# Altium PCB PCB MotherBoard.PcbDoc
Units mm, origin at the board's own origin, x right, y up, seen from the top; angles counter-clockwise.
Board outline 130.1 x 83 mm, 2 copper layers (Top Layer, Bottom Layer); 61 components, 59 nets, 301 pads, 0 vias.
Unrouted connection lines stored in the file: 177.
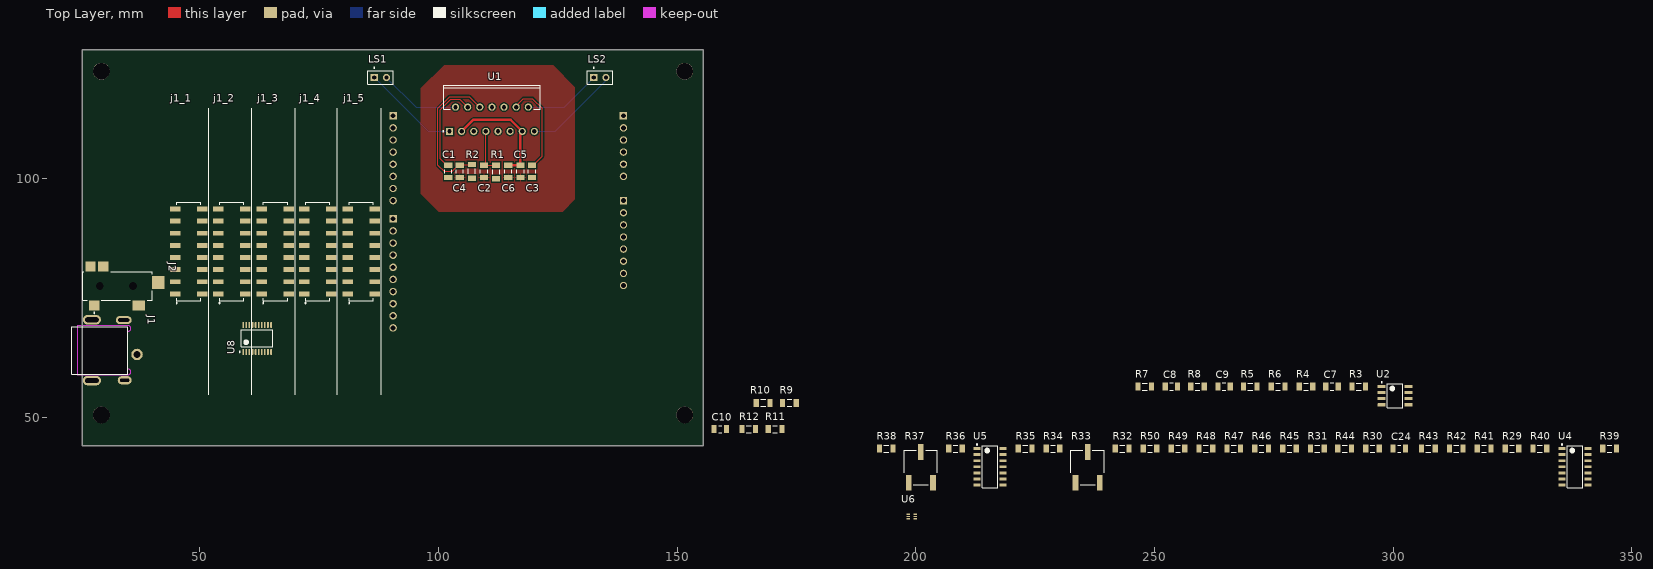
[diagram p0: Top Layer view]
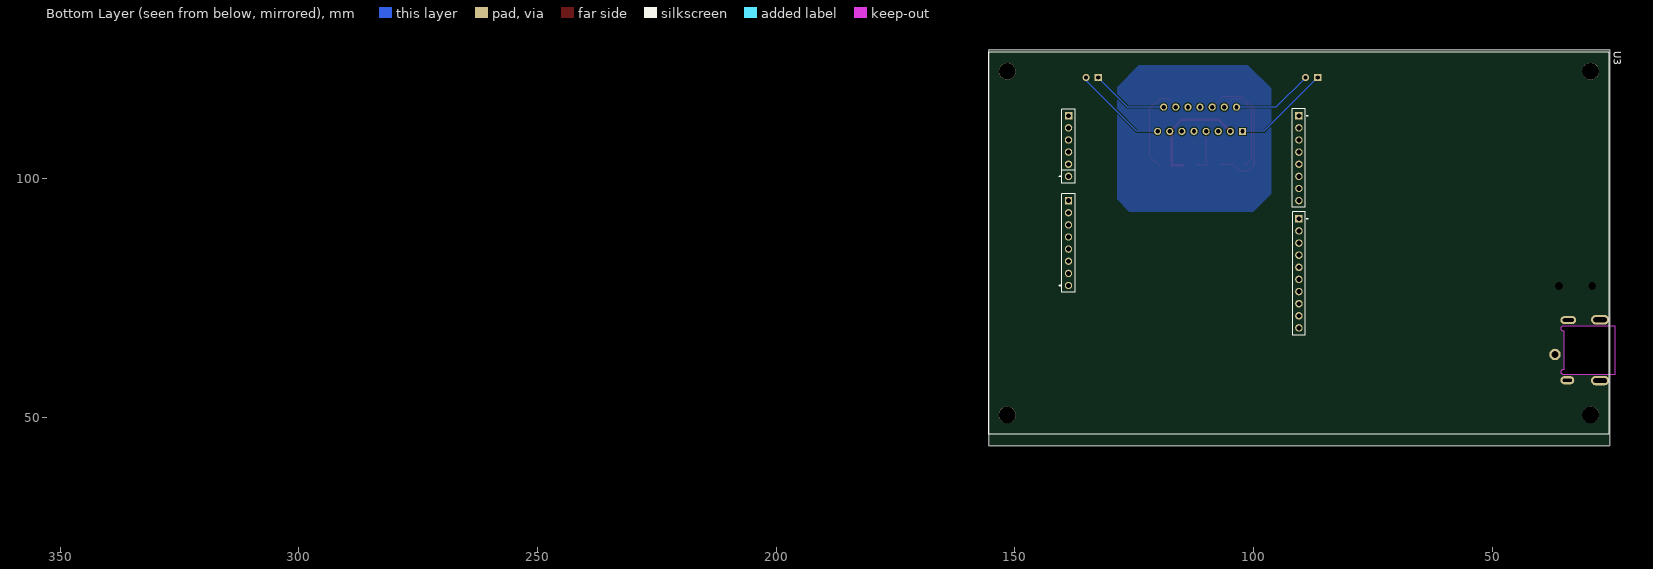
[diagram p1: Bottom Layer view, seen from below]

## Layer stack, top to bottom
Top Solder: solder mask 0.0102, Solder Resist, Dk 3.5
Top Layer: signal copper 0.0356
Dielectric 1: dielectric 0.32, FR-4, Dk 4.8
Bottom Layer: signal copper 0.0356
Bottom Solder: solder mask 0.0102, Solder Resist, Dk 3.5

## Board outline
25.4,44 155.5,44 155.5,127 25.4,127

## Design rules (kind name [scope] priority, off if disabled: settings)
Clearance [All] p1: gap=0.254 ignorepadtopadclearanceinfootprint=FALSE except(0: Arc-Hole Track-Hole SMDPad-Hole THPad-Hole Via-Hole Fill-Hole Poly-Hole Region-Hole Text-Hole)
Height [All] p1: minheight=0 maxheight=2539.975 prefheight=12.7
PolygonConnect [All] p1: connectstyle=Relief reliefconductorwidth=0.254 reliefentries=4 polygonreliefangle="90 Angle" airgapwidth=0.254
RoomDefinition SS6 [InComponentClass('SS6')] p1: confinementstyle=ConfineIn formatcopy=TRUE lockcomponents=FALSE outline 95.947,89.817 128.586,89.817 128.586,125.504 95.947,125.504
RoutingVias [All] p1: holewidth=0.711 width=1.27 viastyle="Through Hole" minholewidth=0.711 minwidth=1.27 maxholewidth=0.711 maxwidth=1.27
SolderMaskExpansion [All] p1: expansion=0.102 istentingtop=FALSE
Width [All] p1: maxlimit=10 minlimit=0.254 preferedwidth=0.254 minimp=50.000000 maximp=50.000000 favimp=50.000000
29 further rules are at their usual default settings.

## Classes and differential pairs
net class "Output R BP[5..1]": "Output R BP1" "Output R BP2" "Output R BP3" "Output R BP4" "Output R BP5"
net class "Output L BP[5..1]": "Output L BP1" "Output L BP2" "Output L BP3" "Output L BP4" "Output L BP5"
net class "AGC Data BP[5..1]": "AGC Data BP1" "AGC Data BP2" "AGC Data BP3" "AGC Data BP4" "AGC Data BP5"
component class SS6: C1 C2 C3 C4 C5 C6 R1 R2 U1
channel class "BP Header": SS1 SS2 SS3 SS4 SS5
component class SS5: j1_5
component class SS4: j1_4
component class SS3: j1_3
component class SS2: j1_2
component class SS1: j1_1
component class "Schematic MotherBoard": C7 C8 C9 C10 C24 J1 J2 LS1 LS2 R3 R4 R5 R6 R7 R8 R9 R10 R11 R12 R29 R30 R31 R32 R33 R34 R35 R36 R37 R38 R39 R40 R41 R42 R43 R44 R45 R46 R47 R48 R49 R50 U2 U3 U4 U5 U6 U8

## Components (designator, comment, footprint, x,y, rotation, side; value= is the part's Value field where it differs from the comment)
C1 "1206GC102KAT1A" AVX-1206-2_L 102.043,101.501 r270 top
C2 "1206GC102KAT1A" AVX-1206-2_L 109.536,101.501 r270 top
C3 "1206GC102KAT1A" AVX-1206-2_L 119.569,101.501 r270 top
C4 "1206GC102KAT1A" AVX-1206-2_L 104.456,101.501 r270 top
C5 "1206GC102KAT1A" AVX-1206-2_L 117.156,101.501 r270 top
C6 "1206GC102KAT1A" AVX-1206-2_L 114.616,101.501 r270 top
C7 "1206GC102KAT1A" AVX-1206-2_L 287.173,56.424 r0 top
C8 "1206GC102KAT1A" AVX-1206-2_L 253.518,56.424 r0 top
C9 "1206GC102KAT1A" AVX-1206-2_L 264.567,56.424 r0 top
C10 "1206GC102KAT1A" AVX-1206-2_L 159,47.5 r0 top
C24 "1206GC102KAT1A" AVX-1206-2_L 301.244,43.434 r0 top
J1 "694105309102" 694105309102 29,64 r270 top
j1_1 "SSM-108-S-DV" "Band Pass Board" 44.85,75.84 r90 top (schematic designator j1)
j1_2 "SSM-108-S-DV" "Band Pass Board" 53.85,75.84 r90 top (schematic designator j1)
j1_3 "SSM-108-S-DV" "Band Pass Board" 63,75.84 r90 top (schematic designator j1)
j1_4 "SSM-108-S-DV" "Band Pass Board" 71.85,75.84 r90 top (schematic designator j1)
j1_5 "SSM-108-S-DV" "Band Pass Board" 81,75.84 r90 top (schematic designator j1)
J2 "35RASMT4BHNTRX" SWIT-35RASMT4BHNTRX_V 34.2,77.5 r0 top
LS1 "Speaker" PIN2 86.549,121.158 r0 top
LS2 "Speaker" PIN2 132.523,121.158 r0 top
R1 "ERJ-8GEY0R00V" RESC3216X70X50NL05T20 112.076,101.374 r90 top
R2 "ERJ-8GEY0R00V" RESC3216X70X50NL05T20 106.996,101.501 r90 top
R3 "ERJ-8GEY0R00V" RESC3216X70X50NL05T20 292.761,56.424 r0 top
R4 "ERJ-8GEY0R00V" RESC3216X70X50NL05T20 281.712,56.424 r0 top
R5 "ERJ-8GEY0R00V" RESC3216X70X50NL05T20 270.028,56.424 r0 top
R6 "ERJ-8GEY0R00V" RESC3216X70X50NL05T20 275.87,56.424 r0 top
R7 "ERJ-8GEY0R00V" RESC3216X70X50NL05T20 247.93,56.424 r0 top
R8 "ERJ-8GEY0R00V" RESC3216X70X50NL05T20 258.979,56.424 r0 top
R9 "ERJ-8GEY0R00V" RESC3216X70X50NL05T20 173.5,53 r0 top
R10 "ERJ-8GEY0R00V" RESC3216X70X50NL05T20 168,53 r0 top
R11 "ERJ-8GEY0R00V" RESC3216X70X50NL05T20 170.5,47.5 r0 top
R12 "ERJ-8GEY0R00V" RESC3216X70X50NL05T20 165,47.5 r0 top
R29 "ERJ-8GEY0R00V" RESC3216X70X50NL05T20 324.866,43.434 r0 top
R30 "ERJ-8GEY0R00V" RESC3216X70X50NL05T20 295.656,43.434 r0 top
R31 "ERJ-8GEY0R00V" RESC3216X70X50NL05T20 284.099,43.434 r0 top
R32 "ERJ-8GEY0R00V" RESC3216X70X50NL05T20 243.205,43.434 r0 top
R33 "3361P-1-254GLF" FP-3361P-MFG 235.966,39.497 r0 top
R34 "ERJ-8GEY0R00V" RESC3216X70X50NL05T20 228.727,43.434 r0 top
R35 "ERJ-8GEY0R00V" RESC3216X70X50NL05T20 222.885,43.434 r0 top
R36 "ERJ-8GEY0R00V" RESC3216X70X50NL05T20 208.28,43.434 r0 top
R37 "3361P-1-254GLF" FP-3361P-MFG 201.041,39.497 r0 top
R38 "ERJ-8GEY0R00V" RESC3216X70X50NL05T20 193.802,43.434 r0 top
R39 "ERJ-8GEY0R00V" RESC3216X70X50NL05T20 345.313,43.434 r0 top
R40 "ERJ-8GEY0R00V" RESC3216X70X50NL05T20 330.708,43.434 r0 top
R41 "ERJ-8GEY0R00V" RESC3216X70X50NL05T20 319.024,43.434 r0 top
R42 "ERJ-8GEY0R00V" RESC3216X70X50NL05T20 313.182,43.434 r0 top
R43 "ERJ-8GEY0R00V" RESC3216X70X50NL05T20 307.34,43.434 r0 top
R44 "ERJ-8GEY0R00V" RESC3216X70X50NL05T20 289.814,43.434 r0 top
R45 "ERJ-8GEY0R00V" RESC3216X70X50NL05T20 278.257,43.434 r0 top
R46 "ERJ-8GEY0R00V" RESC3216X70X50NL05T20 272.415,43.434 r0 top
R47 "ERJ-8GEY0R00V" RESC3216X70X50NL05T20 266.573,43.434 r0 top
R48 "ERJ-8GEY0R00V" RESC3216X70X50NL05T20 260.731,43.434 r0 top
R49 "ERJ-8GEY0R00V" RESC3216X70X50NL05T20 254.889,43.434 r0 top
R50 "ERJ-8GEY0R00V" RESC3216X70X50NL05T20 249.047,43.434 r0 top
U1 "TDA7297" TDA7297 102.297,109.883 r0 top
U2 "TL072ACDR" D0008A_M 300.381,54.519 r0 top
U3 "stm32f746g disco" "stm32f746g disco" 90.486,86.487 r180 bottom
U4 "TL074CDR" D0014A_N 338.074,39.624 r0 top
U5 "TL074CDR" D0014A_N 215.519,39.624 r0 top
U6 "TPS563206DRLR" TPS563206DRLR 199.136,29.21 r0 top
U8 "DS3930E+T&R" MAXM-U20+5_L 62,66.5 r90 top

## Footprints (in the part's own frame and the unit in brackets; to place one, negate y for a bottom-side part, rotate by r counter-clockwise, add the part's x,y. Pads: shape width x height; smd on the part's side, far side on the other; paste and mask are expansions set on the pad)
694105309102 [mm] "DC Power Jack Right Angled Shielded THT ?4.93"
  round 2.4 hole 1.4: 1(0.85,7.85)
  oval 1.7x3.3 hole 0.7 slot 2.3 at 90 deg: 2(-6.35,5.05)
  oval 1.7x2.9 hole 0.7 slot 1.9 at 90 deg: 3(6.25,5.25)
  oval 2x3.8 hole 1 slot 2.8 at 90 deg: S1(-6.425,-1.6) S2(6.325,-1.6)
  Keep-Out Layer board cut-out: -5.2,-4.65 5.1,-4.65 5.1,5.95 5.041,6.21 4.874,6.419 4.634,6.535 4.366,6.535 4.126,6.419 3.959,6.21 3.9,5.95 3.9,5.95 -4,5.95 -4.059,6.21 -4.226,6.419 -4.466,6.535 -4.734,6.535 -4.974,6.419 -5.141,6.21 -5.2,5.95 -5.2,5.95
  silkscreen extent -5,-5.85 5,5.85, body extent -6.61,-5.85 6.51,8.35, height 5.45
AVX-1206-2_L [mm] "SMD, 2-Leads, Body 3.4x1.8mm, IPC High Density"
  rect 1.1x1.7 smd: 1(-1.3,0) 2(1.3,0)
  silkscreen extent -0.35,-0.75 0.35,0.75, body extent -1.7,-0.9 1.7,0.9, height 1.52
"Band Pass Board" [mm]
  rect 1.02x2.22 smd: 1(0,0) 2(0,-5.65) 3(2.54,0) 4(2.54,-5.65) 5(5.08,0) 6(5.08,-5.65) 7(7.62,0) 8(7.62,-5.65) 9(10.16,0) 10(10.16,-5.65) 11(12.7,0) 12(12.7,-5.65) 13(15.24,0) 14(15.24,-5.65) 15(17.78,0) 16(17.78,-5.65)
  silkscreen extent -21.08,-6.99 38.86,-0.16, body extent -21.11,-6.86 38.89,0.69, height 47.5
D0008A_M [mm] "SOIC, 8-Leads, Body 5x4mm, Pitch 1.27mm, IPC Low Density"
  rrect15% 1.65x0.65 smd: 1(-2.825,1.905) 2(-2.825,0.635) 3(-2.825,-0.635) 4(-2.825,-1.905) 5(2.825,-1.905) 6(2.825,-0.635) 7(2.825,0.635) 8(2.825,1.905)
  silkscreen extent -2.95,-2.5 1.6,2.9, body extent -3,-2.45 3,2.45, height 1.63
D0014A_N [mm] "SOIC, 14-Leads, Body 8.75x4mm, Pitch 1.27mm, IPC Medium Density"
  rrect17% 1.45x0.6 smd: 1(-2.725,3.81) 2(-2.725,2.54) 3(-2.725,1.27) 4(-2.725,0) 5(-2.725,-1.27) 6(-2.725,-2.54) 7(-2.725,-3.81) 8(2.725,-3.81) 9(2.725,-2.54) 10(2.725,-1.27) 11(2.725,0) 12(2.725,1.27) 13(2.725,2.54) 14(2.725,3.81)
  silkscreen extent -2.85,-4.38 1.6,4.78, body extent -3.02,-4.32 3.02,4.32, height 1.59
FP-3361P-MFG [mm]
  rect 1.19x3.3 smd paste+0 mask+0: 1(-2.54,-3.2) 2(0,3.2) 3(2.54,-3.2)
  silkscreen extent -3.48,-3.69 3.48,3.6, body extent -3.58,-4.95 3.58,4.95, height 0.25
MAXM-U20+5_L [mm] "SOP, 20-Leads, Body 6.5x4.4mm, Pitch 0.65mm, IPC High Density"
  oval 1.3x0.35 smd: 1(-2.825,2.925) 2(-2.825,2.275) 3(-2.825,1.625) 4(-2.825,0.975) 5(-2.825,0.325) 6(-2.825,-0.325) 7(-2.825,-0.975) 8(-2.825,-1.625) 9(-2.825,-2.275) 10(-2.825,-2.925) 11(2.825,-2.925) 12(2.825,-2.275) 13(2.825,-1.625) 14(2.825,-0.975) 15(2.825,-0.325) 16(2.825,0.325) 17(2.825,0.975) 18(2.825,1.625) 19(2.825,2.275) 20(2.825,2.925)
  silkscreen extent -2.95,-3.3 1.78,3.77, body extent -2.25,-3.3 2.25,3.3, height 1.1
PIN2 [mm] "Photosensitive Diode; 2 Leads"
  rect 1.5x1.5 hole 0.9: 1(0,0)
  round 1.5 hole 0.9: 2(2.54,0)
  silkscreen extent -1.4,-1.4 3.94,2.17
RESC3216X70X50NL05T20 [mm] "Chip Resistor, 2-Leads, Body 3.20x1.60mm, IPC Medium Density"
  rect 1.1x1.65 smd: 1(-1.425,0) 2(1.425,0)
  silkscreen extent -0.5,-0.72 0.5,0.72, body extent -1.63,-0.82 1.62,0.82, height 0.7
"stm32f746g disco" [mm]
  round 1.55 hole 1 paste-1000 mask+0: 1(-48.26,-8.89) 2(-48.26,-6.35) 3(-48.26,-3.81) 4(-48.26,-1.27) 5(-48.26,1.27) 6(-48.26,3.81) 7(-48.26,6.35) 16(0,24.13) 17(0,21.59) 18(0,19.05) 19(0,16.51) 20(0,13.97) 21(0,11.43) 22(0,8.89)
  rect 1.55x1.55 hole 1 paste-1000 mask+0: 8(-48.26,8.89) 15(0,26.67)
  round 1.57 hole 1.02 paste-1000 mask+0: 9(-48.26,13.97) 10(-48.26,16.51) 11(-48.26,19.05) 12(-48.26,21.59) 13(-48.26,24.13) 24(0,2.54) 25(0,0) 26(0,-2.54) 27(0,-5.08) 28(0,-7.62) 29(0,-10.16) 30(0,-12.7) 31(0,-15.24) 32(0,-17.78)
  rect 1.57x1.57 hole 1.02 paste-1000 mask+0: 14(-48.26,26.67) 23(0,5.08)
  round 3.5 hole 3.5 unplated paste-1000 mask+0: ""(-61.1,-36) ""(-61.1,36) ""(61.1,-36) ""(61.1,36)
  silkscreen extent -65,-40 65,40, body extent -65.16,-42.35 64.84,40.42, height 19.6
SWIT-35RASMT4BHNTRX_V [mm] "Jack, 5-Leads, Body 17x6mm"
  rect 2.2x2.1 smd: 1(-6.3,-4.05) 2(-4.4,4.05)
  rect 2.7x2.1 smd: 3(3,-4.05)
  rect 2x2.1 smd: 4(-7.1,4.05)
  rect 2.6x2.7 smd: 5(7.1,0.75)
  rect 0x0 hole 1.6 unplated: MH(-5.2,0) MH(1.8,0)
  silkscreen extent -8.7,-5.77 5.8,3, body extent -11.2,-3 5.8,3, height 5
TDA7297 [mm] "TDA7297"
  rect 1.5x1.5 hole 0.9: 1(0,0)
  round 1.5 hole 0.9: 2(1.27,5.08) 3(2.54,0) 4(3.81,5.08) 5(5.08,0) 6(6.35,5.08) 7(7.62,0) 8(8.89,5.08) 9(10.16,0) 10(11.43,5.08) 11(12.7,0) 12(13.97,5.08) 13(15.24,0) 14(16.51,5.08) 15(17.78,0)
  silkscreen extent -1.42,-0.12 18.99,9.63, body extent -1.21,-0.26 18.99,9.63, height 21
TPS563206DRLR [mm]
  rect 0.67x0.3 smd: 1(-0.74,0.5) 2(-0.74,0) 3(-0.74,-0.5) 4(0.74,-0.5) 5(0.74,0) 6(0.74,0.5)
  body extent -0.81,-0.8 0.81,0.8, height 0.58

## Part data
C1 C2 C3 C4 C5 C6 C7 C8 C9 C10 C24: library part CMP-2000-05468-1, "Chip Capacitor, 1 nF, +/- 10%, -55 to 125 degC, 1206 (3216 Metric), RoHS, Tape and Reel", Capacitance=0.001uF, Case Size/Dimension=1206, Dielectric=X7R, Manufacturer=AVX, Package Description="2-Pin SMD, Body 3.4 x 1.8 mm", Rated Voltage=2000V, Tolerance=10%, Tolerance (%)=±10%, Datasheet URL=https://datasheet.ciiva.com/11787/0900766b80ed4c37-11787781.pdf, Datasheet Version=11/2010, Manufacturer URL=http://www.avx.com/, Mounting Technology=SurfaceMount, Package Reference=1206, PartNumber=1206GC102KAT1A, Voltage Rating DC=2000V
J1: library part CMP-1502-00187-2, Color=Black, Current Rating=5.5A, Flammability Rating="UL94 V-0", Insulation Resistance=100MΩ, Max Operating Temperature=85°C, Min Operating Temperature=-40°C, Operating Supply Voltage=20V, Connector Type=Power, Contact Gender=Female, Contact Plating=Tin, Gender=Male, Housing Material=Polyamide, Mount="Through Hole", NexarPartId=52645182, Packaging="Tape and Reel", REACH SVHC=Unknown, RoHS=Compliant, Shielding=Shielded, Termination="Through Hole", Voltage Rating=20V, Voltage Rating (DC)=20V
j1_1 j1_2 j1_3 j1_4 j1_5: library part "Band Pass Board"
J2: library part CMP-1772-00001-1, "Female 3.5 mm Phone Jack, 5 Position, Height 5 mm, RoHS, Tape and Reel", Current Rating="50 mA", Package Quantity=3000, Voltage Rating (DC)="12 V", ComponentLink1Description="Manufacturer URL", ComponentLink1URL=http://www.switchcraft.com/, ComponentLink2Description=Datasheet, ComponentLink2URL=http://www.switchcraft.com/Drawings/35rasmt4bhntrx_cd.pdf, Contact Material=Silver, Contact Plating=Silver, DatasheetVersion="Rev. C, 07/2014", Mount="Through Hole", PackageDescription="Female 3.5 mm Phone Jack, 5 Position, Height 5 mm", PackageReference=35RASMT4BHNTRX, Packaging="Tape and Reel", RoHSCompliant=true
LS1 LS2: "Loudspeaker", LatestRevisionDate=17-Jul-2002, LatestRevisionNote="Re-released for DXP Platform.", PackageReference=PIN2, Published=24-Mar-1999, Publisher="Altium Limited"
R1 R2 R3 R4 R5 R6 R7 R8 R9 R10 R11 R12 R29 R30 R31 R32 R34 R35 R36 R38 R39 R40 R41 R42 R43 R44 R45 R46 R47 R48 R49 R50: library part CMP-2003-00541-1, Manufacturer=Panasonic, Part Number=ERJ-8GEY0R00V
R33 R37: library part CMP-00059-01034199-1, "3361P-1-254GLF SMD Single-Turn Trimmer Potentiometers 1/4 SQ 250KOHMS 10% 0.5WATTS", Max Operating Temperature=125°C, Max Power Dissipation=500mW, Min Operating Temperature=-55°C, Resistance=250kΩ, Temperature Coefficient=100ppm/°C, Tolerance=10%, Voltage Rating=300V, Composition=Cermet, Contact Plating=Tin, Depth=8.53mm, Height=4.8768mm, Length=6.71mm, Military Standard=Not, Mount="Surface Mount", NexarPartId=1034199, Number of Turns=1, Power Rating=500mW, REACH SVHC="No SVHC", RoHS=Compliant, Schedule B="8533400080, 8533400080", Taper=Linear, Termination="Gull Wing", Weight=567mg, Width=6.7056mm
U2: library part CMP-0017-00380-2, "Low-Noise JFET-Input Operational Amplifier, 7 to 36 V, 0 to 70 degC, 8-pin SOIC (D8), Green (RoHS & no Sb/Br)", Manufacturer="Texas Instruments", Rating=Catalog, Total Supply Voltage(Max)(+5V is 5, +/-5V is 10)=36, Total Supply Voltage(Min)(+5V is 5, +/-5V is 10)=7, CMRR(Min)(dB)=75, Code_JEDEC=MS-012, ComponentLink1Description="Manufacturer URL", ComponentLink1URL=http://www.ti.com/, ComponentLink2Description=Datasheet, ComponentLink2URL=http://www.ti.com/lit/ds/symlink/tl072a.pdf, ComponentLink3Description="Package Specification", ComponentLink3URL=http://www.ti.com/litv/pdf/msoi002j, DatasheetVersion=SLOS080J, Eco-Plan="Green (RoHS & no Sb/Br)", GBW(Typ)(MHz)=3, IIB(Max)(pA)=200, Iq per channel(Max)(mA)=2.5, Mounting Technology="Surface Mount", Number of Channels=2, Offset Drift(Typ)(uV/C)=18, PackageDescription="8-Pin Plastic Small Outline, Body 4.9 x 3.9 mm, Pitch 1.27 mm", PackageReference=D0008A, PackageVersion="4040047-3/M, 06/2011", PartNumber=TL072ACDR, Slew Rate(Typ)(V/us)=13, Sub Family="General Purpose Amplifier, High Supply Voltage Amplifier (>=30V)", Vio (25C)(Max)(mV)=6, Vn at 1kHz(Typ)(nV/rtHz)=18
U4 U5: library part CMP-0017-00003-2, "Quad Low-Noise JFET-Input General-Purpose Operational Amplifier, 7 to 36 V, 0 to 70 degC, 14-pin SOIC (D14), Green (RoHS & no Sb/Br)", Manufacturer="Texas Instruments", Rating=Military, Total Supply Voltage(Max)(+5V is 5, +/-5V is 10)=36, Total Supply Voltage(Min)(+5V is 5, +/-5V is 10)=7, CMRR(Min)(dB)=70, Code_JEDEC=MS-012, ComponentLink1Description="Manufacturer URL", ComponentLink1URL=http://www.ti.com/, ComponentLink2Description=Datasheet, ComponentLink2URL=http://www.ti.com/lit/ds/symlink/tl074.pdf, ComponentLink3Description="Package Specification", ComponentLink3URL=http://www.ti.com/lit/ml/mpds177g/mpds177g.pdf, DatasheetVersion=SLOS080J, Eco-Plan="Green (RoHS & no Sb/Br)", GBW(Typ)(MHz)=3, IIB(Max)(pA)=200, Iq per channel(Max)(mA)=2.5, Mounting Technology="Surface Mount", Number of Channels=4, Offset Drift(Typ)(uV/C)=18, PackageDescription="14-Pin Plastic Small Outline, Body 8.65 x 3.90 mm, Pitch 1.27 mm", PackageReference=D0014A, PackageVersion="4040047-5/M, 06/2011", PartNumber=TL074CDR, Slew Rate(Typ)(V/us)=13, Sub Family="General Purpose Amplifier, High Supply Voltage Amplifier (>=30V)", Vio (25C)(Max)(mV)=10, Vn at 1kHz(Typ)(nV/rtHz)=18
U8: library part CMP-0023-00559-1, "Hex Unbuffered DAC with I/O and Memory with 2-Wire Addressable Control Interface, Non-Volatile, Linear Taper, 256 Steps, -40 to 85 degC, 20-pin TSSOP (U20+5), Pb-Free, Tape and Reel", Code_JEDEC=MO-153, ComponentLink1Description="Manufacturer URL", ComponentLink1URL=http://www.maximintegrated.com/, ComponentLink2Description=Datasheet, ComponentLink2URL=http://datasheets.maximintegrated.com/en/ds/DS3930.pdf, ComponentLink3Description="Package Specification", ComponentLink3URL=http://pdfserv.maximintegrated.com/package_dwgs/21-0066.PDF, Control Interface="2-Wire Addressable", DatasheetVersion="Rev. 0", Features="EEPROM Wiper Memory, Varactor Tuning for RF Applications", Mounting Technology="Surface Mount", PackageDescription="20-Pin Thin Shrink Small-Outline Package (U20+5), Body 6.5 x 4.4 mm, Pitch 0.65 mm", PackageReference=U20+5, PackageVersion="Rev. L, 07/2010", PartNumber=DS3930E+T&R

## Nets (pads, with @x,y where several pads share a name; then routed paths per layer and width w, separated by ;. In a path a pad name is that pad's centre, name@x,y a point inside that pad or via, vN(x,y) a via of type N, cw(c..) or ccw(c..) an arc to the next point about the centre after c; other vN are vias at no path point)
+5: U3.8 U8.9 U8.15 U8.20
"AGC Data BP1": j1_1.5 j1_1.15 U8.19
"AGC Data BP2": j1_2.5 j1_2.15 U8.18
"AGC Data BP3": j1_3.5 j1_3.15 U8.17
"AGC Data BP4": j1_4.5 j1_4.15 U8.14
"AGC Data BP5": j1_5.5 j1_5.15 U8.13
"Filtered Output L": C1.2 R9.2 R43.1 U2.1
"Filtered Output R": C3.2 R10.2 R49.1 U2.7
GND: J2.1 R12.1 R34.2 R38.2 R43.2 R49.2 U2.3 U2.5 U3.6 U3.7 U3.29 U4.1 U4.2 U4.6 U4.7 U4.8 U4.9 U4.13 U4.14 U6.3 U8.1 U8.2 U8.3 U8.10 U8.16
InputL: J2.2 R34.1 U5.10
InputR: J2.3 R38.1 U5.3
NetC1_1: C1.1 U1.4 | length 19.8
  Top Layer w0.254: C1.1 101.743,102.801 101.32,103.224 101.32,103.232 100.392,104.16 100.392,114.427 102.579,116.614 104.456,116.614 U1.4
NetC2_1: C2.1 R1.2 U1.7 | length 9.8
  Top Layer w0.254: U1.7 109.917,103.182 C2.1 109.538,102.799 R1.2
NetC3_1: C3.1 U1.12 | length 20.1
  Top Layer w0.254: U1.12 116.267,115.217 117.791,116.741 119.668,116.741 121.728,114.681 121.728,104.66 119.869,102.801 C3.1
NetC4_1: C4.1 R2.2 U1.6 | length 30.8
  Top Layer w0.254: R2.2 104.581,102.926 C4.1 104.156,102.801 102.856,101.501 101.154,101.501 99.884,102.771 99.884,114.681 102.325,117.122 106.488,117.122 U1.6
NetC7_2: C7.2 R3.2 R4.2 U4.5
NetC8_2: C8.2 R5.2 R7.2 U4.10
NetC9_2: C9.2 R6.2 R8.2 U4.12
NetC10_1: C10.1 U6.4
NetC10_2: C10.2 R11.2 U6.2
NetC24_2: C24.2 R29.2 R30.2 U4.3
Netj1_1_6: j1_1.6 j1_1.8 j1_1.10 j1_1.11 j1_1.13 j1_1.16
Netj1_2_6: j1_2.6 j1_2.8 j1_2.10 j1_2.11 j1_2.13 j1_2.16
Netj1_3_6: j1_3.6 j1_3.8 j1_3.10 j1_3.11 j1_3.13 j1_3.16
Netj1_4_6: j1_4.6 j1_4.8 j1_4.10 j1_4.11 j1_4.13 j1_4.16
Netj1_5_6: j1_5.6 j1_5.8 j1_5.10 j1_5.11 j1_5.13 j1_5.16
NetLS1_1: LS1.1 U1.1 | length 20.5
  Bottom Layer w0.254: LS1.1@86.515,121.192 97.824,109.883 U1.1
NetLS1_2: LS1.2 U1.2 | length 17
  Bottom Layer w0.254: LS1.2 95.284,114.963 U1.2
NetLS2_1: LS2.1 U1.14 | length 16.3
  Bottom Layer w0.254: U1.14 126.328,114.963 LS2.1
NetLS2_2: LS2.2 U1.15 | length 19.7
  Bottom Layer w0.254: U1.15 124.423,109.883 LS2.2@135.253,120.713
NetR1_1: R1.1
NetR2_1: R2.1
NetR9_1: R9.1 R39.2 R40.2 R41.2 R42.2 R44.2 U2.2
NetR10_1: R10.1 R45.2 R46.2 R47.2 R48.2 R50.2 U2.6
NetR11_1: R11.1 R12.2 U6.6
NetR31_1: R31.1 U5.13
NetR32_1: R32.1 U5.8 U5.9
NetR32_2: R32.2 R33.3
NetR33_2: R33.2 U5.12
NetR35_1: R35.1 U5.6
NetR36_1: R36.1 U5.1 U5.2
NetR36_2: R36.2 R37.3
NetR37_2: R37.2 U5.5
"Output L BP1": j1_1.14 R39.1
"Output L BP2": j1_2.14 R40.1
"Output L BP3": j1_3.14 R41.1
"Output L BP4": j1_4.14 R42.1
"Output L BP5": j1_5.14 R44.1
"Output R BP1": j1_1.12 R45.1
"Output R BP2": j1_2.12 R46.1
"Output R BP3": j1_3.12 R47.1
"Output R BP4": j1_4.12 R48.1
"Output R BP5": j1_5.12 R50.1
"Pre Filter L": j1_1.9 j1_2.9 j1_3.9 j1_4.9 j1_5.9 R31.2 U5.14
"Pre Filter R": j1_1.7 j1_2.7 j1_3.7 j1_4.7 j1_5.7 R35.2 U5.7
SCL: U3.32 U8.5
SDA: U3.31 U8.4
VCC: C5.1 C6.1 J1.1 j1_1.1 j1_1.2 j1_2.1 j1_2.2 j1_3.1 j1_3.2 j1_4.1 j1_4.2 j1_5.1 j1_5.2 R3.1 R5.1 R6.1 R29.1 U1.3 U1.13 U2.8 U4.4 U5.4 U6.1 U6.5 | length 24.5
  Top Layer w0.5: U1.3 107.25,112.296 115.124,112.296 U1.13 117.537,109.612 117.156,109.231 C5.1 C6.1
VEE: C2.2 C4.2 C5.2 C6.2 C7.1 C8.1 C9.1 C24.1 J1.2 j1_1.3 j1_1.4 j1_2.3 j1_2.4 j1_3.3 j1_3.4 j1_4.3 j1_4.4 j1_5.3 j1_5.4 R4.1 R7.1 R8.1 R30.1 U1.8 U1.9 U2.4 U4.11 U5.11
pads on no net: J1.3 J1.S1 J1.S2 J2.4 J2.5 J2.MH R33.1 R37.1 U1.5 U1.10 U1.11 U3. U3.1 U3.2 U3.3 U3.4 U3.5 U3.9 U3.10 U3.11 U3.12 U3.13 U3.14 U3.15 U3.16 U3.17 U3.18 U3.19 U3.20 U3.21 U3.22 U3.23 U3.24 U3.25 U3.26 U3.27 U3.28 U3.30 U8.6 U8.7 U8.8 U8.11 U8.12

## Polygon pours and split planes (outlines as drawn)
VEE on Top Layer "NONET_L-01_P-001" (solid, remove dead copper, pour order 3): 128.586,95.631 128.586,119.126 124.014,123.698 101.154,123.698 96.328,118.872 96.328,96.774 100.011,93.091 126.046,93.091
VEE on Bottom Layer "NONET_L-01_P-001" (solid, remove dead copper, pour order 2): 128.586,95.631 128.586,119.126 124.014,123.698 101.154,123.698 96.328,118.872 96.328,96.774 100.011,93.091 126.046,93.091

## Text inside footprints (layer, text, board x,y; h text height)
J1: Top Courtyard "PCB Edge" at 23.43,65.82 h1 r270; Mechanical 8 "Board Cutout Area" at 28.75,67.55 h1 r270